# Altium PCB ADAS_ECU_MB_revA.PcbDoc (part 2 of 6)
Units mm, origin at the board's own origin, x right, y up, seen from the top; angles counter-clockwise.
Board outline 180 x 120 mm, 6 copper layers (Top Layer, Mid Layer 1, Mid Layer 2, Mid Layer 3, Mid Layer 4, Bottom Layer), stack 1.554 mm thick; 648 components, 505 nets, 4389 pads, 80 vias.
Unrouted connection lines stored in the file: 197.
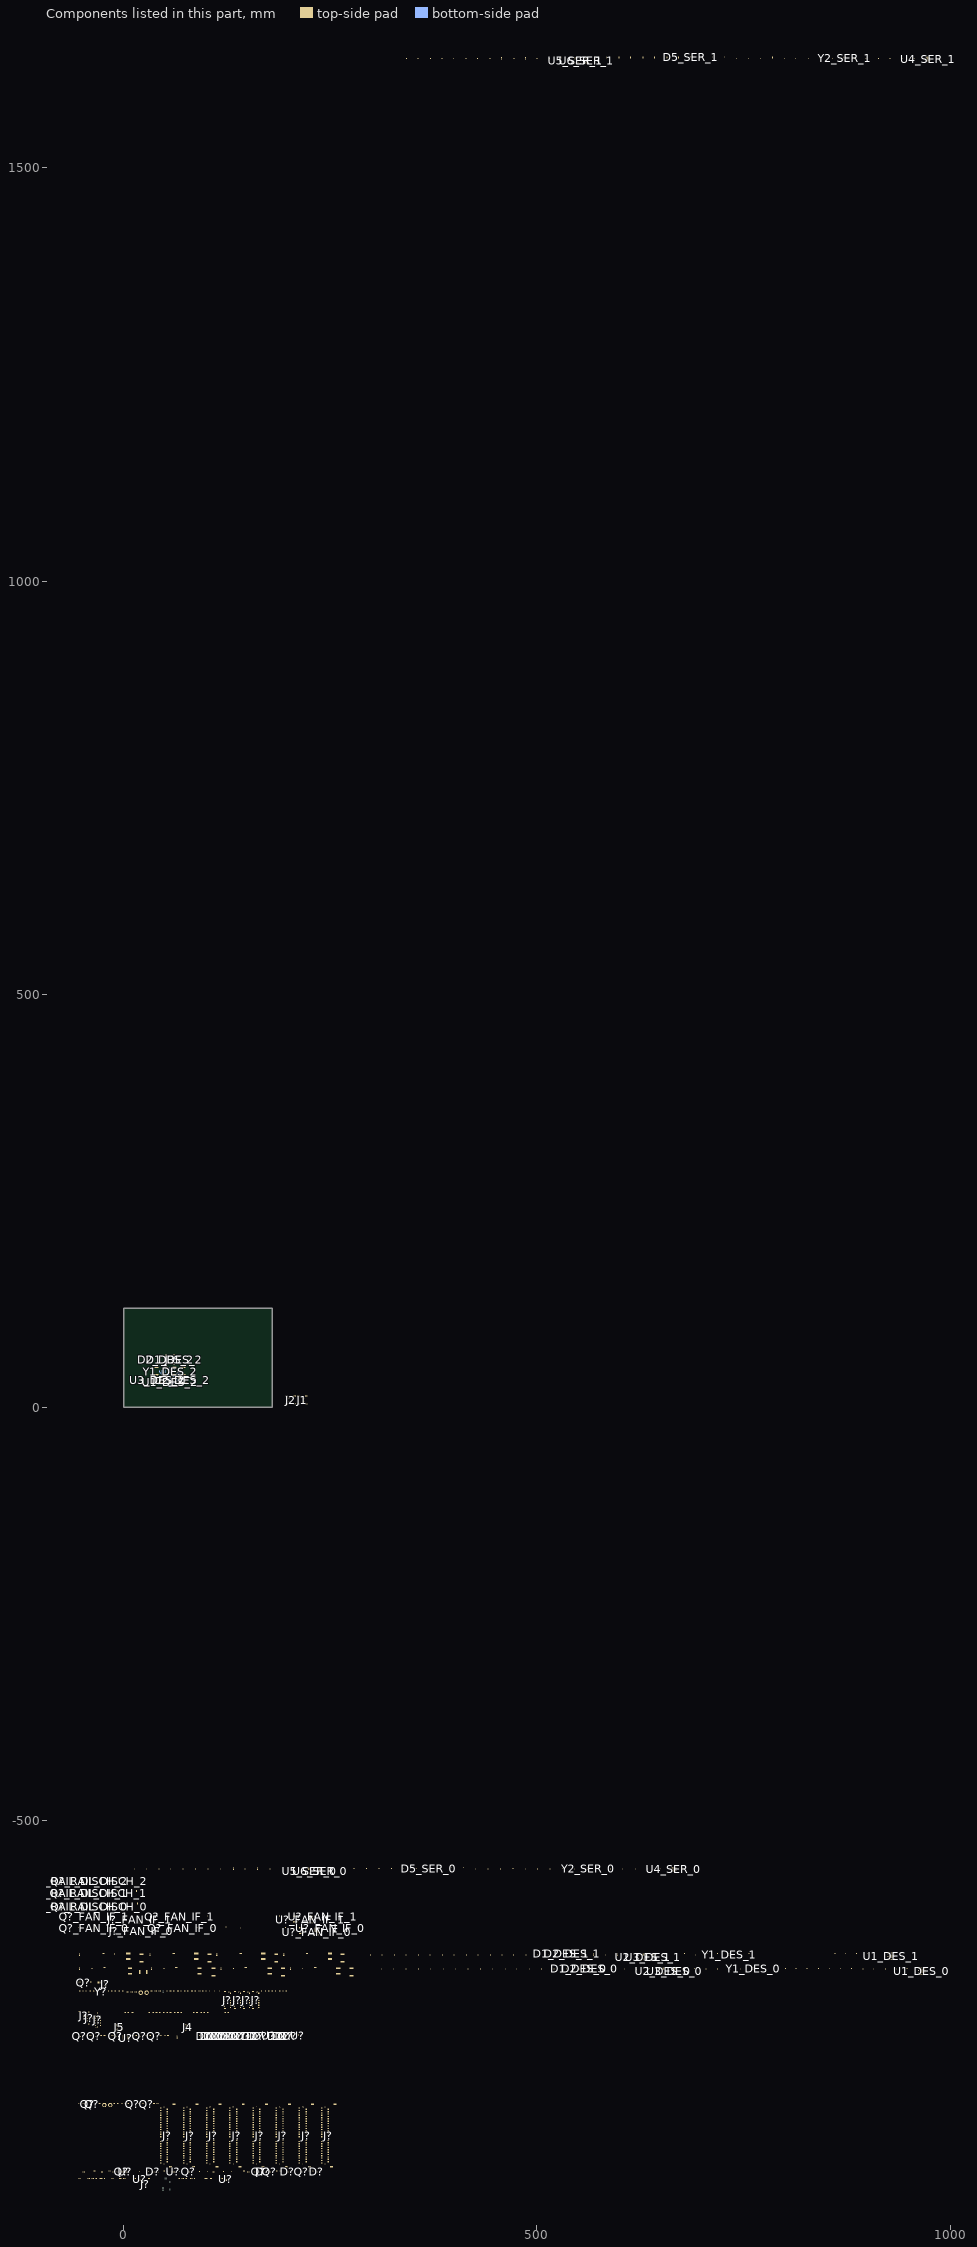
[diagram p2: the components of this part, seen from the top]

## Components (designator, comment, footprint, x,y, rotation, side; value= is the part's Value field where it differs from the comment) (continued)
L1_DES_2 "744066101" WE-TPC_1038 72.5,44 r180 top (schematic designator L1)
L2_DES_0 "ADL32VHC-220M" FP-1210POC-MFG 231.628,-679.081 r90 top value=22uH (schematic designator L2)
L2_DES_1 "ADL32VHC-220M" FP-1210POC-MFG 221.628,-662.08 r90 top value=22uH (schematic designator L2)
L2_DES_2 "ADL32VHC-220M" FP-1210POC-MFG 65.75,41.5 r0 bottom value=22uH (schematic designator L2)
L3_DES_0 "PFL1609-561MEW" FP-PFL1609-MFG 244.628,-679.081 r90 top value=0.56uH (schematic designator L3)
L3_DES_1 "PFL1609-561MEW" FP-PFL1609-MFG 234.628,-661.08 r90 top value=0.56uH (schematic designator L3)
L3_DES_2 "PFL1609-561MEW" FP-PFL1609-MFG 66.5,38.5 r270 bottom value=0.56uH (schematic designator L3)
L4_DES_0 "744066101" WE-TPC_1038 192.628,-683.081 r0 top (schematic designator L4)
L4_DES_1 "744066101" WE-TPC_1038 184.628,-666.081 r0 top (schematic designator L4)
L4_DES_2 "744066101" WE-TPC_1038 61.5,44 r180 top (schematic designator L4)
L5_DES_0 "ADL32VHC-220M" FP-1210POC-MFG 147.628,-679.081 r90 top value=22uH (schematic designator L5)
L5_DES_1 "ADL32VHC-220M" FP-1210POC-MFG 141.628,-662.08 r90 top value=22uH (schematic designator L5)
L5_DES_2 "ADL32VHC-220M" FP-1210POC-MFG 60.5,45.25 r0 bottom value=22uH (schematic designator L5)
L6_DES_0 "PFL1609-561MEW" FP-PFL1609-MFG 160.628,-679.081 r90 top value=0.56uH (schematic designator L6)
L6_DES_1 "PFL1609-561MEW" FP-PFL1609-MFG 153.628,-661.08 r90 top value=0.56uH (schematic designator L6)
L6_DES_2 "PFL1609-561MEW" FP-PFL1609-MFG 62.25,42.5 r0 bottom value=0.56uH (schematic designator L6)
L7_DES_0 "744066101" WE-TPC_1038 108.628,-683.081 r0 top (schematic designator L7)
L7_DES_1 "744066101" WE-TPC_1038 103.628,-666.081 r0 top (schematic designator L7)
L7_DES_2 "744066101" WE-TPC_1038 39.5,44 r180 top (schematic designator L7)
L8_DES_0 "ADL32VHC-220M" FP-1210POC-MFG 63.628,-679.081 r90 top value=22uH (schematic designator L8)
L8_DES_1 "ADL32VHC-220M" FP-1210POC-MFG 60.628,-662.08 r90 top value=22uH (schematic designator L8)
L8_DES_2 "ADL32VHC-220M" FP-1210POC-MFG 46.25,41.5 r180 bottom value=22uH (schematic designator L8)
L9_DES_0 "PFL1609-561MEW" FP-PFL1609-MFG 76.628,-679.081 r90 top value=0.56uH (schematic designator L9)
L9_DES_1 "PFL1609-561MEW" FP-PFL1609-MFG 72.628,-661.08 r90 top value=0.56uH (schematic designator L9)
L9_DES_2 "PFL1609-561MEW" FP-PFL1609-MFG 45.5,38.5 r270 bottom value=0.56uH (schematic designator L9)
L10_DES_0 "744066101" WE-TPC_1038 23.628,-683.081 r90 top (schematic designator L10)
L10_DES_1 "744066101" WE-TPC_1038 21.628,-666.081 r0 top (schematic designator L10)
L10_DES_2 "744066101" WE-TPC_1038 50.5,44 r180 top (schematic designator L10)
L11_DES_0 "ADL32VHC-220M" FP-1210POC-MFG -23.372,-679.081 r90 top value=22uH (schematic designator L11)
L11_DES_1 "ADL32VHC-220M" FP-1210POC-MFG -24.372,-662.08 r90 top value=22uH (schematic designator L11)
L11_DES_2 "ADL32VHC-220M" FP-1210POC-MFG 51.5,45.5 r180 bottom value=22uH (schematic designator L11)
L12_DES_0 "PFL1609-561MEW" FP-PFL1609-MFG -9.372,-679.081 r90 top value=0.56uH (schematic designator L12)
L12_DES_1 "PFL1609-561MEW" FP-PFL1609-MFG -11.372,-662.08 r90 top value=0.56uH (schematic designator L12)
L12_DES_2 "PFL1609-561MEW" FP-PFL1609-MFG 49.75,42.75 r180 bottom value=0.56uH (schematic designator L12)
MP? "9774025243R" 9774025243 -16.372,-844.081 r0 top
MP? "9774025243R" 9774025243 -23.372,-844.081 r0 top
MP? "9774025243R" 9774025243 27.628,-708.081 r0 top
MP? "9774025243R" 9774025243 20.628,-708.081 r0 top
Q? "BSS138W-7-F" DIOD-SOT323-3_V 19.628,-761.081 r0 top
Q? "BSS138W-7-F" DIOD-SOT323-3_V -35.372,-761.081 r0 top
Q? "BSS138W-7-F" DIOD-SOT323-3_V 10.628,-843.081 r0 top
Q? "BSS138W-7-F" DIOD-SOT323-3_V 27.628,-843.081 r0 top
Q? "BSS138W-7-F" DIOD-SOT323-3_V 36.628,-761.081 r0 top
Q? "BSS138W-7-F" DIOD-SOT323-3_V -53.372,-761.081 r0 top
Q? "BSS138W-7-F" DIOD-SOT323-3_V 78.628,-925.081 r0 top
Q? "BSS138W-7-F" DIOD-SOT323-3_V -2.372,-925.081 r0 top
Q? "BSS138W-7-F" DIOD-SOT323-3_V 176.628,-925.081 r0 top
Q? "SSM6N7002KFU,LF" FP-SSOP6-P-0_65A-MFG -38.372,-843.081 r0 top
Q? "BSS138W-7-F" DIOD-SOT323-3_V 163.628,-925.081 r0 top
Q? "BSS138W-7-F" DIOD-SOT323-3_V 215.628,-925.081 r0 top
Q? "SSM6N7002KFU,LF" FP-SSOP6-P-0_65A-MFG -43.372,-843.081 r0 top
Q? "BSS138W-7-F" DIOD-SOT323-3_V -48.372,-696.081 r0 top
Q? "BSS138W-7-F" DIOD-SOT323-3_V -9.372,-761.081 r0 top
Q?_FAN_IF_0 "BSS138W-7-F" DIOD-SOT323-3_V 71.628,-630.08 r90 top (schematic designator Q?)
Q?_FAN_IF_0 "BSS138W-7-F" DIOD-SOT323-3_V -35.372,-630.08 r90 top (schematic designator Q?)
Q?_FAN_IF_1 "BSS138W-7-F" DIOD-SOT323-3_V 67.628,-616.08 r90 top (schematic designator Q?)
Q?_FAN_IF_1 "BSS138W-7-F" DIOD-SOT323-3_V -35.372,-616.08 r90 top (schematic designator Q?)
Q?_RAIL_DISCH_0 "SSM6N7002KFU,LF" FP-SSOP6-P-0_65A-MFG -53.372,-604.08 r90 top (schematic designator Q?)
Q?_RAIL_DISCH_0 "SSM6N7002KFU,LF" FP-SSOP6-P-0_65A-MFG -29.372,-604.08 r90 top (schematic designator Q?)
Q?_RAIL_DISCH_1 "SSM6N7002KFU,LF" FP-SSOP6-P-0_65A-MFG -53.372,-588.08 r90 top (schematic designator Q?)
Q?_RAIL_DISCH_1 "SSM6N7002KFU,LF" FP-SSOP6-P-0_65A-MFG -30.372,-588.08 r90 top (schematic designator Q?)
Q?_RAIL_DISCH_2 "SSM6N7002KFU,LF" FP-SSOP6-P-0_65A-MFG -53.372,-573.08 r90 top (schematic designator Q?)
Q?_RAIL_DISCH_2 "SSM6N7002KFU,LF" FP-SSOP6-P-0_65A-MFG -29.372,-573.08 r90 top (schematic designator Q?)
R1_DES_0 "402" R0603B 947.629,-678.081 r90 top (schematic designator R1)
R1_DES_1 "402" R0603B 911.629,-661.08 r90 top (schematic designator R1)
R1_DES_2 "402" R0603B 59,39 r225 bottom (schematic designator R1)
R2_DES_0 "10k" R0603B 853.629,-678.081 r90 top (schematic designator R2)
R2_DES_1 "10k" R0603B 821.629,-661.08 r90 top (schematic designator R2)
R2_DES_2 "10k" R0603B 53,39 r135 bottom (schematic designator R2)
R3_DES_0 "49.9" R0603B 867.629,-678.081 r90 top (schematic designator R3)
R3_DES_1 "49.9" R0603B 834.629,-661.08 r90 top (schematic designator R3)
R3_DES_2 "49.9" R0603B 64,38 r225 bottom (schematic designator R3)
R4_DES_0 "49.9" R0603B 880.629,-678.081 r90 top (schematic designator R4)
R4_DES_1 "49.9" R0603B 847.629,-661.08 r90 top (schematic designator R4)
R4_DES_2 "49.9" R0603B 63,39 r225 bottom (schematic designator R4)
R5_DES_0 "DNP" R0603B 826.629,-678.081 r90 top (schematic designator R5)
R5_DES_1 "DNP" R0603B 795.629,-661.08 r90 top (schematic designator R5)
R5_DES_2 "DNP" R0603B 64,34 r225 bottom (schematic designator R5)
R6_DES_0 "DNP" R0603B 840.629,-678.081 r90 top (schematic designator R6)
R6_DES_1 "DNP" R0603B 808.629,-661.08 r90 top (schematic designator R6)
R6_DES_2 "DNP" R0603B 47,33 r135 bottom (schematic designator R6)
R7_DES_0 "10k" R0603B 800.629,-678.081 r90 top (schematic designator R7)
R7_DES_1 "10k" R0603B 769.629,-661.08 r90 top (schematic designator R7)
R7_DES_2 "10k" R0603B 65,33 r225 bottom (schematic designator R7)
R8_DES_0 "10k" R0603B 813.629,-678.081 r90 top (schematic designator R8)
R8_DES_1 "10k" R0603B 782.629,-661.08 r90 top (schematic designator R8)
R8_DES_2 "10k" R0603B 48,34 r315 bottom (schematic designator R8)
R9_DES_0 "49.9" R0603B 676.629,-678.081 r90 top (schematic designator R9)
R9_DES_1 "49.9" R0603B 650.629,-661.08 r90 top (schematic designator R9)
R9_DES_2 "49.9" R0603B 49,39 r315 bottom (schematic designator R9)
R10_DES_0 "49.9" R0603B 690.629,-678.081 r90 top (schematic designator R10)
R10_DES_1 "49.9" R0603B 663.629,-661.08 r90 top (schematic designator R10)
R10_DES_2 "49.9" R0603B 48,38 r315 bottom (schematic designator R10)
R11_DES_0 "120" R0603B 635.629,-678.081 r90 top (schematic designator R11)
R11_DES_1 "120" R0603B 610.629,-661.08 r90 top (schematic designator R11)
R11_DES_2 "120" R0603B 47,28 r180 bottom (schematic designator R11)
R12_DES_0 "5.1k" R0603B 216.628,-678.081 r90 top (schematic designator R12)
R12_DES_1 "5.1k" R0603B 206.628,-661.08 r90 top (schematic designator R12)
R12_DES_2 "5.1k" R0603B 68.5,43.5 r90 bottom (schematic designator R12)
R13_DES_0 "5.1k" R0603B 132.628,-678.081 r90 top (schematic designator R13)
R13_DES_1 "5.1k" R0603B 126.628,-661.08 r90 top (schematic designator R13)
R13_DES_2 "5.1k" R0603B 60.5,47.75 r180 bottom (schematic designator R13)
R14_DES_0 "5.1k" R0603B 48.628,-678.081 r90 top (schematic designator R14)
R14_DES_1 "5.1k" R0603B 45.628,-661.08 r90 top (schematic designator R14)
R14_DES_2 "5.1k" R0603B 43.5,43.5 r90 bottom (schematic designator R14)
R15_DES_0 "5.1k" R0603B -38.372,-678.081 r90 top (schematic designator R15)
R15_DES_1 "5.1k" R0603B -39.372,-661.08 r90 top (schematic designator R15)
R15_DES_2 "5.1k" R0603B 51.5,48 r0 bottom (schematic designator R15)
R16_SER_0 "49.9" R0603B 530.829,-557.08 r90 top (schematic designator R16)
R16_SER_1 "49.9" R0603B 842.201,1633.6 r90 top (schematic designator R16)
R17_SER_0 "402" R0603B 470.828,-557.08 r90 top (schematic designator R17)
R17_SER_1 "402" R0603B 785.201,1633.6 r90 top (schematic designator R17)
R18_SER_0 "0402 JUMPER" RESC1005X40X25ML05T05 410.828,-557.08 r90 top (schematic designator R18)
R18_SER_1 "0402 JUMPER" RESC1005X40X25ML05T05 727.201,1633.6 r90 top (schematic designator R18)
R19_SER_0 "0402 JUMPER" RESC1005X40X25ML05T05 396.828,-557.08 r90 top (schematic designator R19)
R19_SER_1 "0402 JUMPER" RESC1005X40X25ML05T05 712.201,1633.6 r90 top (schematic designator R19)
R20_SER_0 "10k" R0603B 381.828,-557.08 r90 top (schematic designator R20)
R20_SER_1 "10k" R0603B 698.201,1633.6 r90 top (schematic designator R20)
R21_SER_0 "10k" R0603B 353.828,-557.08 r90 top (schematic designator R21)
R21_SER_1 "10k" R0603B 671.201,1633.6 r90 top (schematic designator R21)
R22_SER_0 "10k" R0603B 338.828,-557.08 r90 top (schematic designator R22)
R22_SER_1 "10k" R0603B 657.201,1633.6 r90 top (schematic designator R22)
R23_SER_0 "100k" R0603B 323.828,-557.08 r90 top (schematic designator R23)
R23_SER_1 "100k" R0603B 642.201,1633.6 r90 top (schematic designator R23)
R24_SER_0 "24k" R0603B 308.828,-557.08 r90 top (schematic designator R24)
R24_SER_1 "24k" R0603B 628.2,1633.6 r90 top (schematic designator R24)
R25_SER_0 "68.1k" R0603B 278.828,-557.08 r90 top (schematic designator R25)
R25_SER_1 "68.1k" R0603B 599.2,1633.6 r90 top (schematic designator R25)
R26_SER_0 "44.2k" R0603B 293.828,-557.08 r90 top (schematic designator R26)
R26_SER_1 "44.2k" R0603B 613.2,1633.6 r90 top (schematic designator R26)
R27_SER_0 "32.4k" R0603B 248.828,-557.08 r90 top (schematic designator R27)
R27_SER_1 "32.4k" R0603B 570.2,1633.6 r90 top (schematic designator R27)
R28_SER_0 "56.2k" R0603B 263.828,-557.08 r90 top (schematic designator R28)
R28_SER_1 "56.2k" R0603B 584.2,1633.6 r90 top (schematic designator R28)
R29_SER_0 "120" R0603B 206.828,-557.08 r90 top (schematic designator R29)
R29_SER_1 "120" R0603B 529.2,1633.6 r90 top (schematic designator R29)
R? "0402 JUMPER" RESC1005X40X25ML05T05 87.628,-924.081 r0 top
R? "0402 JUMPER" RESC1005X40X25ML05T05 219.628,-924.081 r0 top
R? "0402 JUMPER" RESC1005X40X25ML05T05 180.628,-924.081 r0 top
R? "ERJ-2RKF4990X" FP-ERJ2RK-MFG 44.628,-924.081 r0 top
R? "ERJ3EKF1002V" RESC1609X55X30LL15T15 185.628,-924.081 r0 top
R? "0402 JUMPER" RESC1005X40X25ML05T05 -53.372,-924.081 r0 top
R? "0402 JUMPER" RESC1005X40X25ML05T05 10.628,-924.081 r0 top
R? "ERJ-3EKF1003V" RESC1608X55X30ML15T15 150.628,-925.081 r0 top
R? "0402 JUMPER" RESC1005X40X25ML05T05 301.628,-924.081 r0 top
R? "ERJ-3EKF1001V" RESC1608X55X30LL15T15 -35.372,-924.081 r0 top
R? "ERJ-2RKF4990X" FP-ERJ2RK-MFG 126.628,-924.081 r0 top
R? "0402 JUMPER" RESC1005X40X25ML05T05 241.628,-924.081 r0 top
R? "ERJ-3EKF1623V" RESC1608X55X30ML15T15 108.628,-925.081 r0 top
R? "0402 JUMPER" RESC1005X40X25ML05T05 206.628,-924.081 r0 top
R? "ERJ3EKF1801V" RESC1608X55X30LL15T15 228.628,-924.081 r0 top
R? "ERJ-2RKF4990X" FP-ERJ2RK-MFG 63.628,-924.081 r0 top
R? "ERJ-3EKF1003V" RESC1608X55X30ML15T15 -7.372,-925.081 r0 top
R? "ERJ-3EKF1003V" RESC1608X55X30ML15T15 6.628,-925.081 r0 top
R? "ERJ3EKF1002V" RESC1609X55X30LL15T15 -40.372,-760.081 r0 top
R? "ERJ3EKF1002V" RESC1609X55X30LL15T15 27.628,-760.081 r0 top
R? "ERJ-3EKF1003V" RESC1608X55X30ML15T15 53.628,-760.081 r0 top
R? "ERJ3EKF1002V" RESC1609X55X30LL15T15 40.628,-842.081 r0 top
R? "ERJ-3EKF1001V" RESC1608X55X30LL15T15 31.628,-842.081 r0 top
R? "0402 JUMPER" RESC1005X40X25ML05T05 1.628,-842.081 r0 top
R? "ERJ3EKF1002V" RESC1609X55X30LL15T15 14.628,-760.081 r0 top
R? "ERJ-3EKF1003V" RESC1608X55X30ML15T15 -48.372,-842.081 r0 top
R? "ERJ3EKF1002V" RESC1609X55X30LL15T15 -23.372,-760.081 r0 top
R? "0402 JUMPER" RESC1005X40X25ML05T05 275.628,-924.081 r0 top
R? "0402 JUMPER" RESC1005X40X25ML05T05 -40.372,-924.081 r0 top
R? "0402 JUMPER" RESC1005X40X25ML05T05 284.628,-924.081 r0 top
R? "0402 JUMPER" RESC1005X40X25ML05T05 293.628,-924.081 r0 top
R? "ERJ3EKF1002V" RESC1609X55X30LL15T15 -17.372,-924.081 r0 top
R? "ERJ3EKF1002V" RESC1609X55X30LL15T15 31.628,-760.081 r0 top
R? "0402 JUMPER" RESC1005X40X25ML05T05 -7.372,-842.081 r0 top
R? "ERJ3EKF1002V" RESC1609X55X30LL15T15 49.628,-760.081 r0 top
R? "ERJ-3EKF1001V" RESC1608X55X30LL15T15 40.628,-760.081 r0 top
R? "ERJ3EKF1002V" RESC1609X55X30LL15T15 145.628,-924.081 r0 top
R? "RC0402JR-070RL" RESC1005X40X25NL05T10 108.628,-932.081 r0 top
R? "360K 1% 0603(1608)" RESC0603(1608)_M 71.628,-933.081 r0 top value="360000.00 Ohm"
R? "RC0402JR-070RL" RESC1005X40X25NL05T10 8.628,-932.081 r0 top
R? "RC0402JR-070RL" RESC1005X40X25NL05T10 4.628,-932.081 r0 top
R? "RC0402JR-070RL" RESC1005X40X25NL05T10 38.628,-932.081 r0 top
R? "RC0603JR-070RL" RESC1608X55X25ML10T15 118.628,-933.081 r0 top
R? "RC0603JR-070RL" RESC1608X55X25ML10T15 -13.372,-933.081 r0 top
R? "RC0603JR-070RL" RESC1608X55X25ML10T15 0.628,-933.081 r0 top
R? "RC0603JR-070RL" RESC1608X55X25ML10T15 105.628,-933.081 r0 top
R? "ERJ-3EKF1003V" RESC1608X55X30ML15T15 -42.372,-933.081 r0 top
R? "ERJ-3EKF1003V" RESC1608X55X30ML15T15 30.628,-933.081 r0 top
R? "360K 1% 0603(1608)" RESC0603(1608)_M -37.372,-933.081 r0 top value="360000.00 Ohm"
R? "ERJ-3EKF1003V" RESC1608X55X30ML15T15 66.628,-933.081 r0 top
R? "ERJ-3EKF1003V" RESC1608X55X30ML15T15 -53.372,-933.081 r0 top
R? "RC0402JR-070RL" RESC1005X40X25NL05T10 113.628,-932.081 r0 top
R? "RC0402JR-070RL" RESC1005X40X25NL05T10 34.628,-932.081 r0 top
R? "RC0402JR-070RL" RESC1005X40X25NL05T10 43.628,-932.081 r0 top
R? "RC0603JR-070RL" RESC1608X55X25ML10T15 13.628,-933.081 r0 top
R? "ERJ-2RKF4990X" FP-ERJ2RK-MFG 97.628,-924.081 r0 top
R? "0402 JUMPER" RESC1005X40X25ML05T05 112.628,-924.081 r0 top
R? "0402 JUMPER" RESC1005X40X25ML05T05 249.628,-924.081 r0 top
R? "ERJ3EKF1801V" RESC1608X55X30LL15T15 189.628,-924.081 r0 top
R? "0402 JUMPER" RESC1005X40X25ML05T05 202.628,-924.081 r0 top
R? "ERJ3EKF1002V" RESC1609X55X30LL15T15 224.628,-924.081 r0 top
R? "ERJ-2RKF4990X" FP-ERJ2RK-MFG 25.628,-924.081 r0 top
R? "0402 JUMPER" RESC1005X40X25ML05T05 258.628,-924.081 r0 top
R? "ERJ-2RKF4990X" FP-ERJ2RK-MFG 14.628,-924.081 r0 top
R? "ERJ-3EKF1003V" RESC1608X55X30ML15T15 40.628,-925.081 r0 top
R? "ERJ-3EKF3242V" FP-ERJ3EK-MFG 48.628,-924.081 r0 top
R? "ERJ-3EKF1003V" RESC1608X55X30ML15T15 -48.372,-925.081 r0 top
R? "0402 JUMPER" RESC1005X40X25ML05T05 267.628,-924.081 r0 top
R? "ERJ-2RKF4990X" FP-ERJ2RK-MFG 82.628,-924.081 r0 top
R? "ERJ-2RKF4990X" FP-ERJ2RK-MFG 116.628,-924.081 r0 top
R? "ERJ-3EKF1003V" RESC1608X55X30ML15T15 159.628,-925.081 r0 top
R? "0402 JUMPER" RESC1005X40X25ML05T05 154.628,-924.081 r0 top
R? "0402 JUMPER" RESC1005X40X25ML05T05 -44.372,-924.081 r0 top
R? "ERJ3EKF1002V" RESC1609X55X30LL15T15 44.628,-760.081 r0 top
R? "0402 JUMPER" RESC1005X40X25ML05T05 56.628,-706.081 r0 top
R? "0402 JUMPER" RESC1005X40X25ML05T05 33.628,-706.081 r0 top
R? "ERJ-3EKF33R0V" FP-ERJ3EK-MFG 91.628,-706.081 r0 top
R? "ERJ3EKF1002V" RESC1609X55X30LL15T15 52.628,-706.081 r0 top
R? "0402 JUMPER" RESC1005X40X25ML05T05 -53.372,-706.081 r0 top
R? "0402 JUMPER" RESC1005X40X25ML05T05 69.628,-706.081 r0 top
R? "0402 JUMPER" RESC1005X40X25ML05T05 -40.372,-706.081 r0 top
R? "0402 JUMPER" RESC1005X40X25ML05T05 82.628,-706.081 r0 top
R? "ERJ-3EKF1200V" RESC1609X55X30ML15T15 43.628,-706.081 r0 top
R? "ERJ3EKF1002V" RESC1609X55X30LL15T15 65.628,-706.081 r0 top
R? "0402 JUMPER" RESC1005X40X25ML05T05 -32.372,-706.081 r0 top
R? "ERJ-3EKF1200V" RESC1609X55X30ML15T15 38.628,-706.081 r0 top
R? "0402 JUMPER" RESC1005X40X25ML05T05 -45.372,-706.081 r0 top
R? "ERJ-3EKF1003V" RESC1608X55X30ML15T15 -53.372,-695.081 r0 top
R? "ERJ-3EKF1003V" RESC1608X55X30ML15T15 -39.372,-695.081 r0 top
R? "0402 JUMPER" RESC1005X40X25ML05T05 -44.372,-695.081 r0 top
R? "0402 JUMPER" RESC1005X40X25ML05T05 60.628,-706.081 r0 top
R? "0402 JUMPER" RESC1005X40X25ML05T05 77.628,-706.081 r0 top
R? "0402 JUMPER" RESC1005X40X25ML05T05 86.628,-706.081 r0 top
R? "0402 JUMPER" RESC1005X40X25ML05T05 -36.372,-706.081 r0 top
R? "0402 JUMPER" RESC1005X40X25ML05T05 73.628,-706.081 r0 top
R? "ERJ-3EKF1001V" RESC1608X55X30LL15T15 -53.372,-731.081 r0 top
R? "ERJ-3EKF1001V" RESC1608X55X30LL15T15 14.628,-842.081 r0 top
R? "ERJ3EKF1002V" RESC1609X55X30LL15T15 23.628,-842.081 r0 top
R? "ERJ3EKF1002V" RESC1609X55X30LL15T15 -27.372,-760.081 r0 top
R? "ERJ-3EKF1001V" RESC1608X55X30LL15T15 -34.372,-842.081 r0 top
R? "0402 JUMPER" RESC1005X40X25ML05T05 5.628,-842.081 r0 top
R? "ERJ-3EKF1003V" RESC1608X55X30ML15T15 92.628,-760.081 r0 top
R? "ERJ3EKF1002V" RESC1609X55X30LL15T15 18.628,-842.081 r0 top
R? "ERJ3EKF1002V" RESC1609X55X30LL15T15 10.628,-760.081 r0 top
R? "ERJ-3EKF1001V" RESC1608X55X30LL15T15 -29.372,-842.081 r0 top
R? "0402 JUMPER" RESC1005X40X25ML05T05 -2.372,-842.081 r0 top
R? "ERJ-3EKF1001V" RESC1608X55X30LL15T15 -5.372,-760.081 r0 top
R? "ERJ-3EKF1001V" RESC1608X55X30LL15T15 -31.372,-760.081 r0 top
R? "ERJ3EKF1002V" RESC1609X55X30LL15T15 -44.372,-760.081 r0 top
R? "ERJ-3EKF1001V" RESC1608X55X30LL15T15 23.628,-760.081 r0 top
R? "ERJ3EKF1002V" RESC1609X55X30LL15T15 179.628,-760.081 r0 top
R? "ERJ3EKF1002V" RESC1609X55X30LL15T15 36.628,-842.081 r0 top
R? "ERJ3EKF1002V" RESC1609X55X30LL15T15 214.628,-760.081 r0 top
R? "ERJ3EKF1002V" RESC1609X55X30LL15T15 148.628,-760.081 r0 top
R? "ERJ-3EKF1001V" RESC1608X55X30LL15T15 -49.372,-760.081 r0 top
R? "ERJ-3EKF1003V" RESC1608X55X30ML15T15 -53.372,-842.081 r0 top
R? "0402 JUMPER" RESC1005X40X25ML05T05 -11.372,-842.081 r0 top
R?_FAN_IF_0 "ERJ3EKF1002V" RESC1609X55X30LL15T15 52.628,-630.08 r90 top (schematic designator R?)
R?_FAN_IF_0 "ERJ-3EKF1001V" RESC1608X55X30LL15T15 141.628,-629.08 r90 top (schematic designator R?)
R?_FAN_IF_0 "ERJ-3EKF1003V" RESC1608X55X30ML15T15 195.628,-630.08 r90 top (schematic designator R?)
R?_FAN_IF_0 "0402 JUMPER" RESC1005X40X25ML05T05 265.628,-629.08 r90 top (schematic designator R?)
R?_FAN_IF_0 "ERJ3EKF1002V" RESC1609X55X30LL15T15 -54.372,-630.08 r90 top (schematic designator R?)
R?_FAN_IF_0 "ERJ-3EKF1003V" RESC1608X55X30ML15T15 106.628,-630.08 r90 top (schematic designator R?)
R?_FAN_IF_0 "JUMP" RESC1005X40X25ML05T05 123.628,-629.08 r90 top (schematic designator R?)
R?_FAN_IF_0 "ERJ-3EKF1001V" RESC1608X55X30LL15T15 34.628,-629.08 r90 top (schematic designator R?)
R?_FAN_IF_0 "0402 JUMPER" RESC1005X40X25ML05T05 283.628,-629.08 r90 top (schematic designator R?)
R?_FAN_IF_0 "ERJ-3EKF1001V" RESC1608X55X30LL15T15 -18.372,-629.08 r90 top (schematic designator R?)
R?_FAN_IF_0 "ERJ3EKF1002V" RESC1609X55X30LL15T15 88.628,-630.08 r90 top (schematic designator R?)
R?_FAN_IF_0 "ERJ3EKF1002V" RESC1609X55X30LL15T15 -0.372,-630.08 r90 top (schematic designator R?)
R?_FAN_IF_1 "ERJ-3EKF1003V" RESC1608X55X30ML15T15 101.628,-616.08 r90 top (schematic designator R?)
R?_FAN_IF_1 "ERJ3EKF1002V" RESC1609X55X30LL15T15 84.628,-615.08 r90 top (schematic designator R?)
R?_FAN_IF_1 "ERJ3EKF1002V" RESC1609X55X30LL15T15 49.628,-615.08 r90 top (schematic designator R?)
R?_FAN_IF_1 "ERJ-3EKF1001V" RESC1608X55X30LL15T15 32.628,-615.08 r90 top (schematic designator R?)
R?_FAN_IF_1 "0402 JUMPER" RESC1005X40X25ML05T05 256.628,-615.08 r90 top (schematic designator R?)
R?_FAN_IF_1 "ERJ-3EKF1001V" RESC1608X55X30LL15T15 -19.372,-615.08 r90 top (schematic designator R?)
R?_FAN_IF_1 "ERJ3EKF1002V" RESC1609X55X30LL15T15 -2.372,-615.08 r90 top (schematic designator R?)
R?_FAN_IF_1 "JUMP" RESC1005X40X25ML05T05 118.628,-615.08 r90 top (schematic designator R?)
R?_FAN_IF_1 "ERJ3EKF1002V" RESC1609X55X30LL15T15 -54.372,-615.08 r90 top (schematic designator R?)
R?_FAN_IF_1 "0402 JUMPER" RESC1005X40X25ML05T05 274.628,-615.08 r90 top (schematic designator R?)
R?_FAN_IF_1 "ERJ-3EKF1001V" RESC1608X55X30LL15T15 135.628,-615.08 r90 top (schematic designator R?)
R?_FAN_IF_1 "ERJ-3EKF1003V" RESC1608X55X30ML15T15 188.628,-616.08 r90 top (schematic designator R?)
R?_RAIL_DISCH_0 "ERJ-3EKF1003V" RESC1608X55X30ML15T15 -6.372,-600.08 r90 top (schematic designator R?)
R?_RAIL_DISCH_0 "ERJ-3RQF5R6V" RESC1608X55X30LL15T15 16.628,-600.08 r90 top (schematic designator R?)
R?_RAIL_DISCH_1 "ERJ-3EKF1003V" RESC1608X55X30ML15T15 -7.372,-585.08 r90 top (schematic designator R?)
R?_RAIL_DISCH_1 "ERJ-3RQF5R6V" RESC1608X55X30LL15T15 15.628,-585.08 r90 top (schematic designator R?)
R?_RAIL_DISCH_2 "ERJ-3EKF1003V" RESC1608X55X30ML15T15 -6.372,-570.08 r90 top (schematic designator R?)
R?_RAIL_DISCH_2 "ERJ-3RQF5R6V" RESC1608X55X30LL15T15 16.628,-569.08 r90 top (schematic designator R?)
TP? "TPAD6R" "New footprint 1" 127.628,-932.081 r90 top
TP? "TPAD6R" "New footprint 1" 133.628,-932.081 r90 top
TP? "TPAD6R" "New footprint 1" 73.628,-759.081 r90 top
TP? "TPAD6R" "New footprint 1" -49.372,-932.081 r90 top
TP? "TPAD6R" "New footprint 1" 59.628,-932.081 r90 top
TP? "TPAD6R" "New footprint 1" 139.628,-932.081 r90 top
TP? "TPAD6R" "New footprint 1" 85.628,-759.081 r90 top
TP? "TPAD6R" "New footprint 1" 115.628,-706.081 r90 top
TP? "TPAD6R" "New footprint 1" 103.628,-706.081 r90 top
TP? "TPAD6R" "New footprint 1" 109.628,-706.081 r90 top
TP? "TPAD6R" "New footprint 1" 67.628,-759.081 r90 top
TP? "TPAD6R" "New footprint 1" 57.628,-759.081 r90 top
TP? "TPAD6R" "New footprint 1" 79.628,-759.081 r90 top
U1_DES_0 "MAX96724FGTN/V+" MAX96724FGTN_V+-Footprint-1 965.629,-682.081 r0 top (schematic designator U1)
U1_DES_1 "MAX96724FGTN/V+" MAX96724FGTN_V+-Footprint-1 928.629,-664.081 r0 top (schematic designator U1)
U1_DES_2 "MAX96724FGTN/V+" MAX96724FGTN_V+-Footprint-1 56,30.5 r315 bottom (schematic designator U1)
U2_DES_0 "LD1117S18TR" SOT-223_M 652.629,-682.081 r90 top (schematic designator U2)
U2_DES_1 "LD1117S18TR" SOT-223_M 628.629,-665.081 r90 top (schematic designator U2)
U2_DES_2 "LD1117S18TR" SOT-223_M 71,33 r180 bottom (schematic designator U2)
U3_DES_0 "LD1117S12TR" SOT-223_M 666.629,-682.081 r90 top (schematic designator U3)
U3_DES_1 "LD1117S12TR" SOT-223_M 640.629,-665.081 r90 top (schematic designator U3)
U3_DES_2 "LD1117S12TR" SOT-223_M 41,33 r0 bottom (schematic designator U3)
U4_SER_0 "MAX96717FGTJ/VY+T" QFN50P500X500X80_HS-33N 665.829,-559.08 r90 top (schematic designator U4)
U4_SER_1 "MAX96717FGTJ/VY+T" QFN50P500X500X80_HS-33N 973.201,1631.6 r90 top (schematic designator U4)
U5_SER_0 "LD1117S18TR" SOT-223_M 224.828,-561.08 r90 top (schematic designator U5)
U5_SER_1 "LD1117S18TR" SOT-223_M 547.2,1629.6 r90 top (schematic designator U5)
U6_SER_0 "LD1117S12TR" SOT-223_M 237.828,-561.08 r90 top (schematic designator U6)
U6_SER_1 "LD1117S12TR" SOT-223_M 560.2,1629.6 r90 top (schematic designator U6)
U? "LD1117S18TR" SOT-223_M 2.628,-763.081 r0 top
U? "SN74LVC1G07DCKR" FP-DCK0005A-IPC_C 210.628,-760.081 r0 top
U? "SN74LVC1G07DCKR" FP-DCK0005A-IPC_C 175.628,-760.081 r0 top
U? "MAX98357AETE+T" FP-T1633-4-MFG 123.628,-934.081 r0 top
U? "SI1869DH-T1-E3" SOT65P242X110-6N 59.628,-925.081 r0 top
U? "SI1869DH-T1-E3" SOT65P242X110-6N 1.628,-925.081 r0 top
U? "MAX98357AETE+T" FP-T1633-4-MFG 19.628,-934.081 r0 top
U?_FAN_IF_0 "SI1869DH-T1-E3" SOT65P242X110-6N 249.628,-630.08 r90 top (schematic designator U?)
U?_FAN_IF_0 "L78M12CDT-TR" TO-252_L 233.628,-634.08 r90 top (schematic designator U?)
U?_FAN_IF_1 "L78M12CDT-TR" TO-252_L 225.628,-619.08 r90 top (schematic designator U?)
U?_FAN_IF_1 "SI1869DH-T1-E3" SOT65P242X110-6N 240.628,-616.08 r90 top (schematic designator U?)
Y1_DES_0 "ABM8G-25.000MHZ-18-D2Y-T" FP-ABM8G-MFG 761.629,-679.081 r90 top (schematic designator Y1)
Y1_DES_1 "ABM8G-25.000MHZ-18-D2Y-T" FP-ABM8G-MFG 732.629,-662.08 r90 top (schematic designator Y1)
Y1_DES_2 "ABM8G-25.000MHZ-18-D2Y-T" FP-ABM8G-MFG 56,43 r0 bottom (schematic designator Y1)
Y2_SER_0 "ABM8G-25.000MHZ-18-D2Y-T" FP-ABM8G-MFG 561.829,-558.08 r90 top (schematic designator Y2)
Y2_SER_1 "ABM8G-25.000MHZ-18-D2Y-T" FP-ABM8G-MFG 872.201,1632.6 r90 top (schematic designator Y2)
Y? "ASDK-32.768KHZ-LRT" FP-ASDK-MFG -27.372,-707.081 r0 top

## Footprints (in the part's own frame and the unit in brackets; to place one, negate y for a bottom-side part, rotate by r counter-clockwise, add the part's x,y. Pads: shape width x height; smd on the part's side, far side on the other; paste and mask are expansions set on the pad)
9774025243 [mm] "SMT Steel Spacer with internal Thread M2, height 2.5mm"
  round 5.3 / inner round 0 / far side round 0 hole 3 unplated: 1(0,0)
  body extent -2.17,-2.17 2.18,2.17, height 2.5
CAPC1005X60X30NL05T10 [mm] "Chip Capacitor, 2-Leads, Body 1.00x0.50mm, IPC Medium Density"
  rect 0.66x0.62 smd: 1(-0.43,0) 2(0.43,0)
  body extent -0.53,-0.28 0.53,0.27, height 0.6
CAPC2013X88X50ML20T25 [mm] "Chip Capacitor, 2-Leads, Body 2.00x1.25mm, IPC Low Density"
  rect 1.5x1.55 smd: 1(-0.9,0) 2(0.9,0)
  body extent -1.1,-0.72 1.1,0.72, height 0.88
DIOD-SOT323-3_V [mm] "SOT323, 3-Leads, Body 2.2x1.35mm, Pitch 0.65mm"
  rect 0.9x0.7 smd: 1(-0.95,0.65) 2(-0.95,-0.65) 3(0.95,0)
  silkscreen extent -1.07,-1.1 0.67,1.67, body extent -1.1,-1.1 1.1,1.1, height 1.07
FA1-NDRP-PCB-8-Footprint-1 [mil]
  round 75 hole 46: 1(0,0)
  round 100 hole 67: 2(-100,-100) 2(-100,100) 2(100,-100) 2(100,100)
  silkscreen extent -175,-175 175,250, body extent -157,-183 157,758, height 421
FM4-NZSP-PCB-1-Footprint-1 [mm]
  round 1.2 hole 0.7: 1(-2,2) 2(-2,-2) 3(2,-2) 4(2,2)
  round 2.7 hole 1.7: 5(-4.85,4.85) 6(-4.85,-4.85) 7(4.85,-4.85) 8(4.85,4.85)
  round 0.025 smd: 9(0,0)
  Top Layer region: -0.25,6.25 0.25,6.25 0.25,1.5 0.345,1.022 0.616,0.616 1.022,0.345 1.5,0.25 1.5,0.25 6.25,0.25 6.25,-0.25 1.5,-0.25 1.022,-0.345 0.616,-0.616 0.345,-1.022 0.25,-1.5 0.25,-1.5 0.25,-6.25 -0.25,-6.25 -0.25,-1.5 -0.345,-1.022 -0.616,-0.616 -1.022,-0.345 -1.5,-0.25 -1.5,-0.25 -6.25,-0.25 -6.25,0.25 -1.5,0.25 -1.022,0.345 -0.616,0.616 -0.345,1.022 -0.25,1.5 -0.25,1.5
  body extent -6,-6 6,9.05, height 14.34
FP-1-2199230-6-MFG [mm]
  rect 0.3x1.55 smd paste+0 mask+0: 1(-9.25,3.9) 2(-9,-3.65) 3(-8.75,3.9) 4(-8.5,-3.65) 5(-8.25,3.9) 6(-8,-3.65) 7(-7.75,3.9) 8(-7.5,-3.65) 9(-7.25,3.9) 10(-7,-3.65) 11(-6.75,3.9) 12(-6.5,-3.65) 13(-6.25,3.9) 14(-6,-3.65) 15(-5.75,3.9) 16(-5.5,-3.65) 17(-5.25,3.9) 18(-5,-3.65) 19(-4.75,3.9) 20(-4.5,-3.65) 21(-4.25,3.9) 22(-4,-3.65) 23(-3.75,3.9) 24(-3.5,-3.65) 25(-3.25,3.9) 26(-3,-3.65) 27(-2.75,3.9) 28(-2.5,-3.65) 29(-2.25,3.9) 30(-2,-3.65) 31(-1.75,3.9) 32(-1.5,-3.65) 33(-1.25,3.9) 34(-1,-3.65) 35(-0.75,3.9) 36(-0.5,-3.65) 37(-0.25,3.9) 38(0,-3.65) 39(0.25,3.9) 40(0.5,-3.65) 41(0.75,3.9) 42(1,-3.65) 43(1.25,3.9) 44(1.5,-3.65) 45(1.75,3.9) 46(2,-3.65) 47(2.25,3.9) 48(2.5,-3.65) 49(2.75,3.9) 50(3,-3.65) 51(3.25,3.9) 52(3.5,-3.65) 53(3.75,3.9) 54(4,-3.65) 55(4.25,3.9) 56(4.5,-3.65) 57(4.75,3.9) 58(5,-3.65) 67(7.25,3.9) 68(7.5,-3.65) 69(7.75,3.9) 70(8,-3.65) 71(8.25,3.9) 72(8.5,-3.65) 73(8.75,3.9) 74(9,-3.65) 75(9.25,3.9)
  rect 1.2x2.75 smd paste+0 mask+0: 76(-10.35,3.125) 77(10.35,3.125)
  round 1.1 hole 1.1 unplated paste-2539.97 mask+0: ""(-10,-1.375)
  round 1.6 hole 1.6 unplated paste-2539.97 mask+0: ""(10,-1.375)
  silkscreen extent -11,-3.98 11,5.35, body extent -11.1,-4.52 11.1,4.77, height 0.25
FP-0402-L_1_0_0_05-W_0_5-IPC_A [mm]
  rect 0.715x0.672 smd paste+0 mask+0: 1(-0.479,0) 2(0.479,0)
  silkscreen extent -0.84,-0.74 0.84,0.74, body extent -1.04,-0.54 1.04,0.54, height 0.25
FP-1210POC-MFG [mm]
  rect 0.65x2.65 smd paste+0 mask+0: 1(-1.27,0) 2(1.27,0)
  silkscreen extent -0.57,-1.34 0.57,1.34, body extent -1.75,-1.44 1.75,1.44, height 0.25
FP-2920L050DR-MFG [mm]
  rect 2x5.3 smd paste+0 mask+0: 1(-3.3,0) 2(3.3,0)
  silkscreen extent -1.92,-2.72 1.92,2.72, body extent -4.4,-2.82 4.4,2.82, height 0.25
FP-47659-1102-MFG [mm]
  rect 0.3x1.8 smd paste+0 mask+0: 1(4.21,3.08) 2(3.71,3.08) 3(3.21,3.08) 4(2.71,3.08) 5(2.21,3.08) 6(1.71,3.08) 7(1.21,3.08) 8(0.71,3.08) 9(0.21,3.08) 10(-0.29,3.08) 11(-0.79,3.08) 12(-1.29,3.08) 13(-1.79,3.08) 14(-2.29,3.08) 15(-2.79,3.08) 16(-3.29,3.08) 17(-3.79,3.08) 18(-4.29,3.08) 19(-4.79,3.08)
  round 1.9 hole 1.3 paste-2539.97 mask+0: 20(-7.25,0.78) 21(7.25,0.78) 22(0,-2.52)
  silkscreen extent -7.63,-2.9 7.63,4.68, body extent -8.3,-3.57 8.3,4.08, height 0.25
FP-2309413-1-MFG [mm]
  rect 0.3x1.75 smd paste+0 mask+0: 1(33.375,12.1) 2(33.125,3.9) 3(32.875,12.1) 4(32.625,3.9) 5(32.375,12.1) 6(32.125,3.9) 7(31.875,12.1) 8(31.625,3.9) 9(31.375,12.1) 10(31.125,3.9) 11(30.875,12.1) 12(30.625,3.9) 13(30.375,12.1) 14(30.125,3.9) 15(29.875,12.1) 16(29.625,3.9) 17(29.375,12.1) 18(29.125,3.9) 19(28.875,12.1) 20(28.625,3.9) 21(28.375,12.1) 22(28.125,3.9) 23(27.875,12.1) 24(27.625,3.9) 25(27.375,12.1) 26(27.125,3.9) 27(26.875,12.1) 28(26.625,3.9) 29(26.375,12.1) 30(26.125,3.9) 31(25.875,12.1) 32(25.625,3.9) 33(25.375,12.1) 34(25.125,3.9) 35(24.875,12.1) 36(24.625,3.9) 37(24.375,12.1) 38(24.125,3.9) 39(23.875,12.1) 40(23.625,3.9) 41(23.375,12.1) 42(23.125,3.9) 43(22.875,12.1) 44(22.625,3.9) 45(22.375,12.1) 46(22.125,3.9) 47(21.875,12.1) 48(21.625,3.9) 49(21.375,12.1) 50(21.125,3.9) 51(20.875,12.1) 52(20.625,3.9) 53(20.375,12.1) 54(20.125,3.9) 55(19.875,12.1) 56(19.625,3.9) 57(19.375,12.1) 58(19.125,3.9) 59(18.875,12.1) 60(18.625,3.9) 61(18.375,12.1) 62(18.125,3.9) 63(17.875,12.1) 64(17.625,3.9) 65(17.375,12.1) 66(17.125,3.9) 67(16.875,12.1) 68(16.625,3.9) 69(16.375,12.1) 70(16.125,3.9) 71(15.875,12.1) 72(15.625,3.9) 73(15.375,12.1) 74(15.125,3.9) 75(14.875,12.1) 76(14.625,3.9) 77(14.375,12.1) 78(14.125,3.9) 79(13.875,12.1) 80(13.625,3.9) 81(13.375,12.1) 82(13.125,3.9) 83(12.875,12.1) 84(12.625,3.9) 85(12.375,12.1) 86(12.125,3.9) 87(11.875,12.1) 88(11.625,3.9) 89(11.375,12.1) 90(11.125,3.9) 91(10.875,12.1) 92(10.625,3.9) 93(10.375,12.1) 94(10.125,3.9) 95(9.875,12.1) 96(9.625,3.9) 97(9.375,12.1) 98(9.125,3.9) 99(8.875,12.1) 100(8.625,3.9) 101(8.375,12.1) 102(8.125,3.9) 103(7.875,12.1) 104(7.625,3.9) 105(7.375,12.1) 106(7.125,3.9) 107(6.875,12.1) 108(6.625,3.9) 109(6.375,12.1) 110(6.125,3.9) 111(5.875,12.1) 112(5.625,3.9) 113(5.375,12.1) 114(5.125,3.9) 115(4.875,12.1) 116(4.625,3.9) 117(4.375,12.1) 118(4.125,3.9) 119(3.875,12.1) 120(3.625,3.9) 121(3.375,12.1) 122(3.125,3.9) 123(2.875,12.1) 124(2.625,3.9) 125(2.375,12.1) 126(2.125,3.9) 127(1.875,12.1) 128(1.625,3.9) 129(1.375,12.1) 130(1.125,3.9) 131(0.875,12.1) 132(0.625,3.9) 133(0.375,12.1) 134(0.125,3.9) 135(-0.125,12.1) 136(-0.375,3.9) 137(-0.625,12.1) 138(-0.875,3.9) 139(-1.125,12.1) 140(-1.375,3.9) 141(-1.625,12.1) 142(-1.875,3.9) 143(-2.125,12.1) 144(-2.375,3.9) 145(-4.625,12.1) 146(-4.875,3.9) 147(-5.125,12.1) 148(-5.375,3.9) 149(-5.625,12.1) 150(-5.875,3.9) 151(-6.125,12.1) 152(-6.375,3.9) 153(-6.625,12.1) 154(-6.875,3.9) 155(-7.125,12.1) 156(-7.375,3.9) 157(-7.625,12.1) 158(-7.875,3.9) 159(-8.125,12.1) 160(-8.375,3.9) 161(-8.625,12.1) 162(-8.875,3.9) 163(-9.125,12.1) 164(-9.375,3.9) 165(-9.625,12.1) 166(-9.875,3.9) 167(-10.125,12.1) 168(-10.375,3.9) 169(-10.625,12.1) 170(-10.875,3.9) 171(-11.125,12.1) 172(-11.375,3.9) 173(-11.625,12.1) 174(-11.875,3.9) 175(-12.125,12.1) 176(-12.375,3.9) 177(-12.625,12.1) 178(-12.875,3.9) 179(-13.125,12.1) 180(-13.375,3.9) 181(-13.625,12.1) 182(-13.875,3.9) 183(-14.125,12.1) 184(-14.375,3.9) 185(-14.625,12.1) 186(-14.875,3.9) 187(-15.125,12.1) 188(-15.375,3.9) 189(-15.625,12.1) 190(-15.875,3.9) 191(-16.125,12.1) 192(-16.375,3.9) 193(-16.625,12.1) 194(-16.875,3.9) 195(-17.125,12.1) 196(-17.375,3.9) 197(-17.625,12.1) 198(-17.875,3.9) 199(-18.125,12.1) 200(-18.375,3.9) 201(-18.625,12.1) 202(-18.875,3.9) 203(-19.125,12.1) 204(-19.375,3.9) 205(-19.625,12.1) 206(-19.875,3.9) 207(-20.125,12.1) 208(-20.375,3.9) 209(-20.625,12.1) 210(-20.875,3.9) 211(-21.125,12.1) 212(-21.375,3.9) 213(-21.625,12.1) 214(-21.875,3.9) 215(-22.125,12.1) 216(-22.375,3.9) 217(-22.625,12.1) 218(-22.875,3.9) 219(-23.125,12.1) 220(-23.375,3.9) 221(-23.625,12.1) 222(-23.875,3.9) 223(-24.125,12.1) 224(-24.375,3.9) 225(-24.625,12.1) 226(-24.875,3.9) 227(-25.125,12.1) 228(-25.375,3.9) 229(-25.625,12.1) 230(-25.875,3.9) 231(-26.125,12.1) 232(-26.375,3.9) 233(-26.625,12.1) 234(-26.875,3.9) 235(-27.125,12.1) 236(-27.375,3.9) 237(-27.625,12.1) 238(-27.875,3.9) 239(-28.125,12.1) 240(-28.375,3.9) 241(-28.625,12.1) 242(-28.875,3.9) 243(-29.125,12.1) 244(-29.375,3.9) 245(-29.625,12.1) 246(-29.875,3.9) 247(-30.125,12.1) 248(-30.375,3.9) 249(-30.625,12.1) 250(-30.875,3.9) 251(-31.125,12.1) 252(-31.375,3.9) 253(-31.625,12.1) 254(-31.875,3.9) 255(-32.125,12.1) 256(-32.375,3.9) 257(-32.625,12.1) 258(-32.875,3.9) 259(-33.125,12.1) 260(-33.375,3.9)
  rect 2x3.5 smd paste+0 mask+0: 261(-37.75,0) 262(37.75,-4)
  round 1.1 hole 1.1 unplated paste-2539.97 mask+0: ""(-34.4,8)
  round 1.6 hole 1.6 unplated paste-2539.97 mask+0: ""(34.4,8)
  silkscreen extent -38.18,-13.1 40.12,13.1, body extent -39.1,-13.2 39.1,13.2, height 0.25
FP-470531000-MFG [mm]
  rect 1.57x1.57 hole 1.02 paste-2539.97 mask+0: 1(3.81,-0.38)
  round 1.57 hole 1.02 paste-2539.97 mask+0: 2(1.27,-0.38) 3(-1.27,-0.38) 4(-3.81,-0.38)
  round 1.25 hole 1.25 unplated paste-2539.97 mask+0: ""(-1.27,-2.54)
  silkscreen extent -5.2,-3.02 5.92,3.02, body extent -5.3,-3.26 5.3,3.12, height 0.25
FP-ABM8G-MFG [mm]
  rect 1.4x1.2 smd paste+0 mask+0: 1(-1.1,-0.85) 2(1.1,-0.85) 3(1.1,0.85) 4(-1.1,0.85)
  silkscreen extent -2.47,-1.83 1.6,1.83, body extent -1.9,-1.55 1.9,1.55, height 0.25
FP-ASDK-MFG [mm]
  rect 1x0.9 smd paste+0 mask+0: 1(-0.813,-0.613) 2(0.813,-0.613) 3(0.813,0.613) 4(-0.813,0.613)
  silkscreen extent -1.7,-1.76 1.7,1.05, body extent -1.41,-1.16 1.41,1.16, height 0.25
FP-B7B-PH-K-S-MFG [mm]
  rect 1.2x1.2 hole 0.7 paste-2539.97 mask+0: 1(6,-0.55)
  round 1.2 hole 0.7 paste-2539.97 mask+0: 2(4,-0.55) 3(2,-0.55) 4(0,-0.55) 5(-2,-0.55) 6(-4,-0.55) 7(-6,-0.55)
  silkscreen extent -7.95,-2.25 8.52,2.25, body extent -8.05,-2.35 8.05,2.35, height 0.25
FP-BLM15-0_05-MFG [mm]
  rect 0.4x0.5 smd paste+0 mask+0: 1(-0.4,0) 2(0.4,0)
  silkscreen extent -0.53,-0.63 0.52,0.63, body extent -0.7,-0.38 0.7,0.38, height 0.25
FP-C0402-BB-MFG [mm]
  rect 0.52x0.52 smd paste+0 mask+0: 1(-0.4,0) 2(0.4,0)
  silkscreen extent -0.5,-0.64 0.5,0.64, body extent -0.8,-0.4 0.8,0.4, height 0.25
FP-C1005-050-0_05-IPC_C [mm]
  rect 0.539x0.472 smd paste+0 mask+0: 1(-0.367,0) 2(0.367,0)
  silkscreen extent -0.64,-0.67 0.64,0.67, body extent -0.74,-0.38 0.74,0.38, height 0.25
FP-CL05A106MP5NUNC-MFG [mm]
  rect 0.45x0.675 smd paste+0 mask+0: 1(-0.463,0) 2(0.463,0)
  silkscreen extent -0.6,-0.63 0.6,0.63, body extent -0.79,-0.45 0.79,0.45, height 0.25
FP-DCK0005A-IPC_C [mm]
  rect 1.164x0.336 smd paste+0 mask+0: 1(-0.77,0.65)
  rrect100% 1.164x0.336 smd paste+0 mask+0: 2(-0.77,0) 3(-0.77,-0.65) 4(0.77,-0.65) 5(0.77,0.65)
  silkscreen extent -2.05,-1.25 1.05,1.25
FP-DQA0010A-MFG [mm]
  rrect50% 0.565x0.2 smd paste+0 mask+0: 1(-0.417,1) 2(-0.417,0.5) 4(-0.417,-0.5) 5(-0.417,-1) 6(0.417,-1) 7(0.417,-0.5) 9(0.417,0.5) 10(0.417,1)
  rrect25% 0.565x0.4 smd paste-1000 mask+0: 3(-0.417,0) 8(0.417,0)
  silkscreen extent -1.37,-1.48 0.55,1.48, body extent -0.8,-1.4 0.8,1.4, height 0.25
FP-ERJ2RK-MFG [mm]
  rect 0.475x0.5 smd paste+0 mask+0: 1(-0.513,0) 2(0.513,0)
  silkscreen extent -0.53,-0.63 0.53,0.63, body extent -0.85,-0.38 0.85,0.38, height 0.25
FP-ERJ3EK-MFG [mm]
  rect 0.65x0.9 smd paste+0 mask+0: 1(-0.725,0) 2(0.725,0)
  silkscreen extent 0,-0.48 0,0.48, body extent -1.15,-0.58 1.15,0.58, height 0.25
FP-GRM21B-0_2-e0_2_0_7-IPC_B [mm]
  rect 1.255x1.456 smd paste+0 mask+0: 1(-0.826,0) 2(0.826,0)
  silkscreen extent -1.45,-1.13 1.45,1.13, body extent -1.7,-0.98 1.7,0.98, height 0.25
FP-GRM155-0_05-MFG [mm]
  rect 0.55x0.5 smd paste+0 mask+0: 1(-0.475,0) 2(0.475,0)
  silkscreen extent -0.5,-0.65 0.5,0.65, body extent -0.85,-0.38 0.85,0.38, height 0.25
FP-GRM188-0_1-e0_2_0_55-IPC_A [mm]
  rect 1.208x1.012 smd paste+0 mask+0: 1(-0.802,0) 2(0.802,0)
  silkscreen extent -1.41,-0.91 1.41,0.91, body extent -1.91,-1.01 1.91,1.01, height 0.25
FP-HTSW-104-07-G-S-MFG [mm]
  rect 1.57x1.57 hole 1.02 paste-2539.97 mask+0: 1(-3.81,0)
  round 1.57 hole 1.02 paste-2539.97 mask+0: 2(-1.27,0) 3(1.27,0) 4(3.81,0)
  silkscreen extent -5.87,-1.27 5.14,1.27, body extent -5.24,-1.37 5.24,1.37, height 0.25
FP-PFL1609-MFG [mm]
  rect 0.64x1.02 smd paste+0 mask+0: 1(-0.635,0) 2(0.635,0)
  silkscreen extent -0.9,-0.89 0.9,0.89, body extent -1.05,-0.64 1.05,0.64, height 0.25
FP-SSOP6-P-0_65A-MFG [mm]
  rect 0.8x0.4 smd paste+0 mask+0: 1(-0.95,0.65) 2(-0.95,0) 3(-0.95,-0.65) 4(0.95,-0.65) 5(0.95,0) 6(0.95,0.65)
  silkscreen extent -2.05,-1.1 0.18,1.1, body extent -1.45,-1.2 1.45,1.2, height 0.25
FP-T1633-4-MFG [mm]
  rect 0.8x0.3 smd paste+0 mask+0: 1(-1.425,0.75) 2(-1.425,0.25) 3(-1.425,-0.25) 4(-1.425,-0.75) 9(1.425,-0.75) 10(1.425,-0.25) 11(1.425,0.25) 12(1.425,0.75)
  rect 0.3x0.8 smd paste+0 mask+0: 5(-0.75,-1.425) 6(-0.25,-1.425) 7(0.25,-1.425) 8(0.75,-1.425) 13(0.75,1.425) 14(0.25,1.425) 15(-0.25,1.425) 16(-0.75,1.425)
  rect 1.23x1.23 smd paste+0 mask+0: 17(0,0)
  silkscreen extent -2.52,-1.58 1.58,1.58, body extent -1.92,-1.92 1.92,1.92, height 0.25
FP-TSW-102-07-L-S-MFG [mm]
  rect 1.57x1.57 hole 1.02 paste-2539.97 mask+0: 1(-1.27,0)
  round 1.57 hole 1.02 paste-2539.97 mask+0: 2(1.27,0)
  silkscreen extent -3.25,-1.34 2.73,1.34, body extent -2.83,-1.44 2.83,1.44, height 0.25
KEMT-520-B-2_M [mm] "Molded Capacitor, 2-Leads, Body 3.7x3mm, IPC Low Density"
  rect 2.35x2.35 smd: 1(-1.475,0) 2(1.475,0)
  silkscreen extent -2.62,-1.5 1.85,1.85, body extent -1.85,-1.5 1.85,1.5, height 2.11
MAX96724FGTN_V+-Footprint-1 [mm]
  oval 0.95x0.25 smd: 1(-3.875,3.25) 2(-3.875,2.75) 3(-3.875,2.25) 4(-3.875,1.75) 5(-3.875,1.25) 6(-3.875,0.75) 7(-3.875,0.25) 8(-3.875,-0.25) 9(-3.875,-0.75) 10(-3.875,-1.25) 11(-3.875,-1.75) 12(-3.875,-2.25) 13(-3.875,-2.75) 14(-3.875,-3.25) 29(3.875,-3.25) 30(3.875,-2.75) 31(3.875,-2.25) 32(3.875,-1.75) 33(3.875,-1.25) 34(3.875,-0.75) 35(3.875,-0.25) 36(3.875,0.25) 37(3.875,0.75) 38(3.875,1.25) 39(3.875,1.75) 40(3.875,2.25) 41(3.875,2.75) 42(3.875,3.25)
  oval 0.25x0.95 smd: 15(-3.25,-3.875) 16(-2.75,-3.875) 17(-2.25,-3.875) 18(-1.75,-3.875) 19(-1.25,-3.875) 20(-0.75,-3.875) 21(-0.25,-3.875) 22(0.25,-3.875) 23(0.75,-3.875) 24(1.25,-3.875) 25(1.75,-3.875) 26(2.25,-3.875) 27(2.75,-3.875) 28(3.25,-3.875) 43(3.25,3.875) 44(2.75,3.875) 45(2.25,3.875) 46(1.75,3.875) 47(1.25,3.875) 48(0.75,3.875) 49(0.25,3.875) 50(-0.25,3.875) 51(-0.75,3.875) 52(-1.25,3.875) 53(-1.75,3.875) 54(-2.25,3.875) 55(-2.75,3.875) 56(-3.25,3.875)
  rect 4.7x4.7 smd: 57(0,0)
  silkscreen extent -4.97,-4.2 4.2,4.2, body extent -4.05,-4.05 4.05,4.05, height 0.8
MOLX-105133-0001_V [mm] "Micro USB B, 5-Leads, Pitch 0.65mm"
  rect 0.45x1.5 smd: 1(-1.3,0.825) 2(-0.65,0.825) 3(0,0.825) 4(0.65,0.825) 5(1.3,0.825)
  oval 1.8x1.1 hole 0.5 slot 1.2 at 0 deg: 6(-2.8,1.075) 7(2.8,1.075)
  oval 2.2x1.1 hole 0.5 slot 1.6 at 0 deg: 8(0,-1.075)
  silkscreen extent -3.75,-1.56 3.75,2.25, body extent -4.02,-2.22 4,2.23, height 7.51
"New footprint 1" [mm]
  round 0.6 smd paste-1: 1(0,0)
ONSC-SOT-323-3-419-04_V [mm] "SOT23, 3-Leads, Body 2x1.25mm, Pitch 0.65mm"
  rect 0.9x0.7 smd: 1(-0.95,0.65) 2(-0.95,-0.65) 3(0.95,0)
  silkscreen extent -1.07,-1.1 0.63,1.67, body extent -0.63,-1 0.63,1, height 1
QFN50P500X500X80_HS-33N [mm] "QFN, 32-Leads, Body 5.00x5.00mm, Pitch 0.50mm, Thermal Pad 3.10x3.10mm, IPC Medium Density"
  oval 0.85x0.25 smd: 1(-2.4,1.75) 2(-2.4,1.25) 3(-2.4,0.75) 4(-2.4,0.25) 5(-2.4,-0.25) 6(-2.4,-0.75) 7(-2.4,-1.25) 8(-2.4,-1.75) 17(2.4,-1.75) 18(2.4,-1.25) 19(2.4,-0.75) 20(2.4,-0.25) 21(2.4,0.25) 22(2.4,0.75) 23(2.4,1.25) 24(2.4,1.75)
  oval 0.25x0.85 smd: 9(-1.75,-2.4) 10(-1.25,-2.4) 11(-0.75,-2.4) 12(-0.25,-2.4) 13(0.25,-2.4) 14(0.75,-2.4) 15(1.25,-2.4) 16(1.75,-2.4) 25(1.75,2.4) 26(1.25,2.4) 27(0.75,2.4) 28(0.25,2.4) 29(-0.25,2.4) 30(-0.75,2.4) 31(-1.25,2.4) 32(-1.75,2.4)
  rect 3.1x3.1 smd: 33(0,0)
  silkscreen extent -3.42,-2.65 2.65,2.65, body extent -2.5,-2.5 2.5,2.5, height 0.8
QTH-020-02-L-D-DP-A-K-Footprint-1 [mm]
  rect 0.3x1.45 smd: 01(-7.25,3.09) 02(-7.25,-3.09) 03(-6.75,3.09) 04(-6.75,-3.09) 05(-5.75,3.09) 06(-5.75,-3.09) 07(-5.25,3.09) 08(-5.25,-3.09) 09(-4.25,3.09) 10(-4.25,-3.09) 11(-3.75,3.09) 12(-3.75,-3.09) 13(-2.75,3.09) 14(-2.75,-3.09) 15(-2.25,3.09) 16(-2.25,-3.09) 17(-1.25,3.09) 18(-1.25,-3.09) 19(-0.75,3.09) 20(-0.75,-3.09) 21(0.25,3.09) 22(0.25,-3.09) 23(0.75,3.09) 24(0.75,-3.09) 25(1.75,3.09) 26(1.75,-3.09) 27(2.25,3.09) 28(2.25,-3.09) 29(3.25,3.09) 30(3.25,-3.09) 31(3.75,3.09) 32(3.75,-3.09) 33(4.75,3.09) 34(4.75,-3.09) 35(5.25,3.09) 36(5.25,-3.09) 37(6.25,3.09) 38(6.25,-3.09) 39(6.75,3.09) 40(6.75,-3.09)
  rect 2.54x0.64 smd: G1(-8.445,0) G4(8.445,0)
  rect 4.7x0.64 smd: G2(-3.175,0) G3(3.175,0)
  round 1.02 hole 1.02 unplated: ""(-9.24,2.03) ""(9.24,2.03)
  silkscreen extent -10,-2.99 10,4.4, body extent -10,-3.56 10,3.56, height 7.19
R0603B [mm] "Chip Resistor, 0603, 2-Leads, Body 1.58x0.85mm, IPC Medium Density"
  rrect25% 0.8x0.95 smd: 1(-0.65,0) 2(0.65,0)
  silkscreen extent -0.2,-0.7 0.2,0.7, body extent -0.82,-0.48 0.82,0.48, height 0.5
RESC0603(1608)_M [mm] "Chip Resistor, Body 1.6x0.8mm, IPC Low Density"
  rect 1.1x1.1 smd: 1(-0.9,0) 2(0.9,0)
  silkscreen extent -0.05,-0.45 0.05,0.45, body extent -0.85,-0.47 0.85,0.47, height 0.6
RESC1005X40X25ML05T05 [mm] "Chip Resistor, 2-Leads, Body 1.00x0.50mm, IPC Low Density"
  rect 0.65x0.65 smd: 1(-0.5,0) 2(0.5,0)
  body extent -0.53,-0.27 0.53,0.28, height 0.4
RESC1005X40X25NL05T10 [mm] "Chip Resistor, 2-Leads, Body 1.00x0.50mm, IPC Medium Density"
  rect 0.6x0.55 smd: 1(-0.425,0) 2(0.425,0)
  body extent -0.53,-0.27 0.53,0.28, height 0.4
RESC1608X55X25ML10T15 [mm] "Chip Resistor, 2-Leads, Body 1.60x0.80mm, IPC Low Density"
  rect 0.8x1 smd: 1(-0.75,0) 2(0.75,0)
  body extent -0.85,-0.45 0.85,0.45, height 0.55